# Altium PCB PCB.PcbDoc
Units mm, origin at the board's own origin, x right, y up, seen from the top; angles counter-clockwise.
Board outline 121 x 67.5 mm, 2 copper layers (Top Layer, Bottom Layer), stack 1.57 mm thick; 47 components, 32 nets, 186 pads, 30 vias.
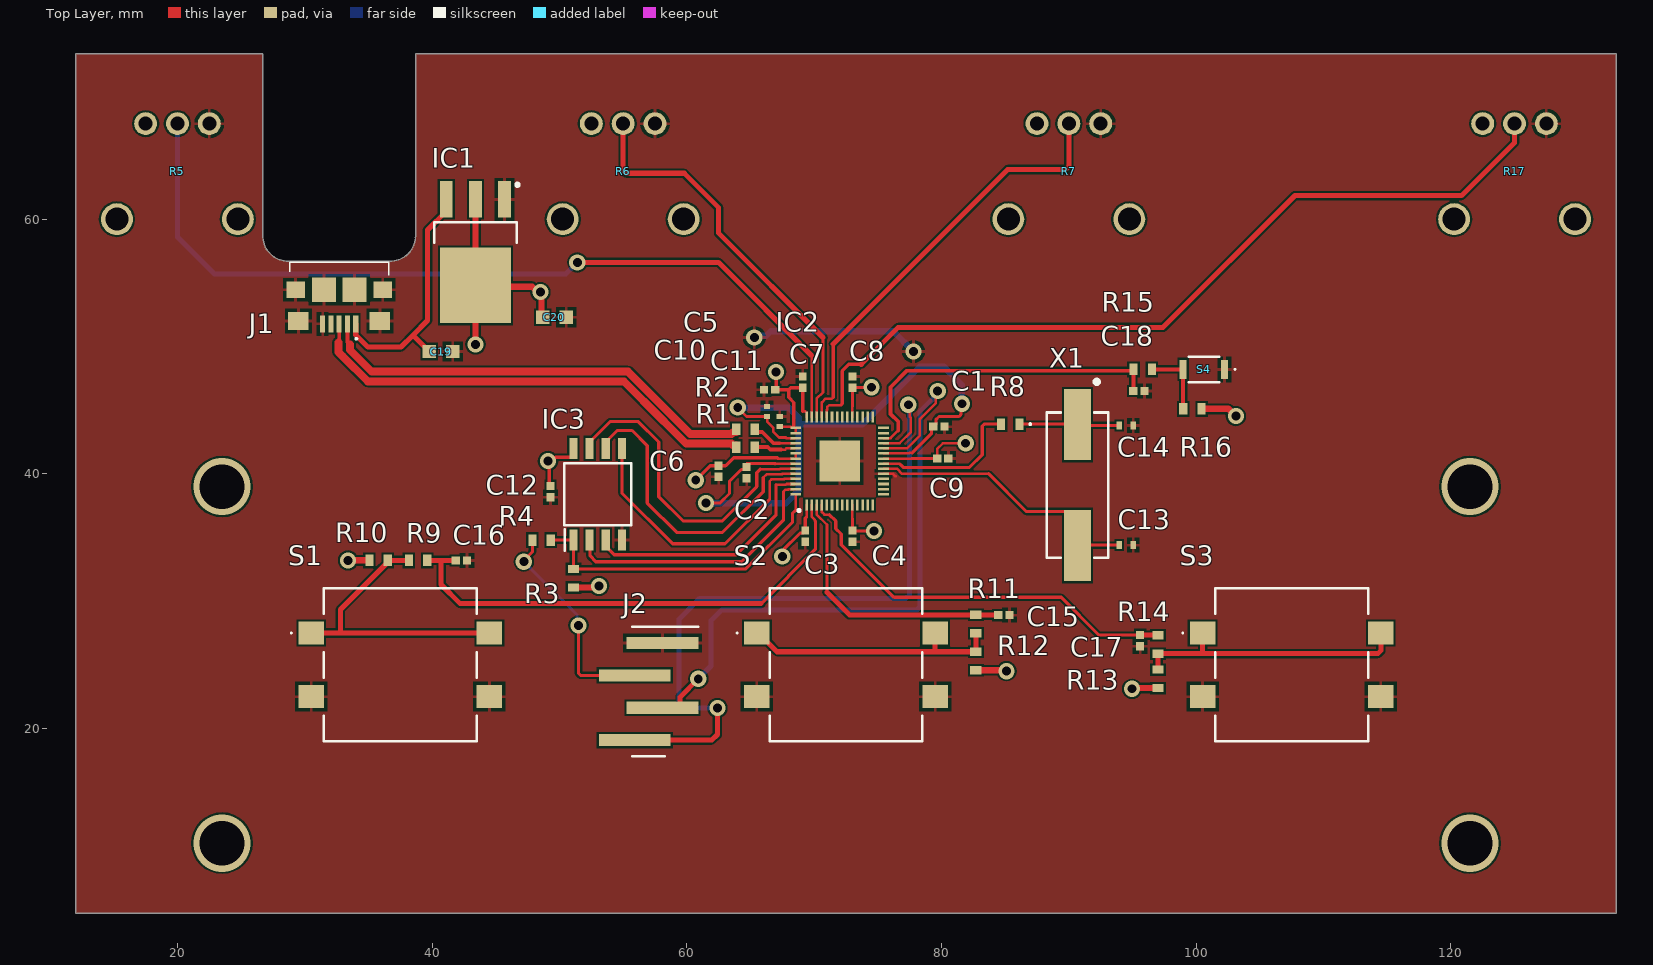
[diagram p0: Top Layer view]
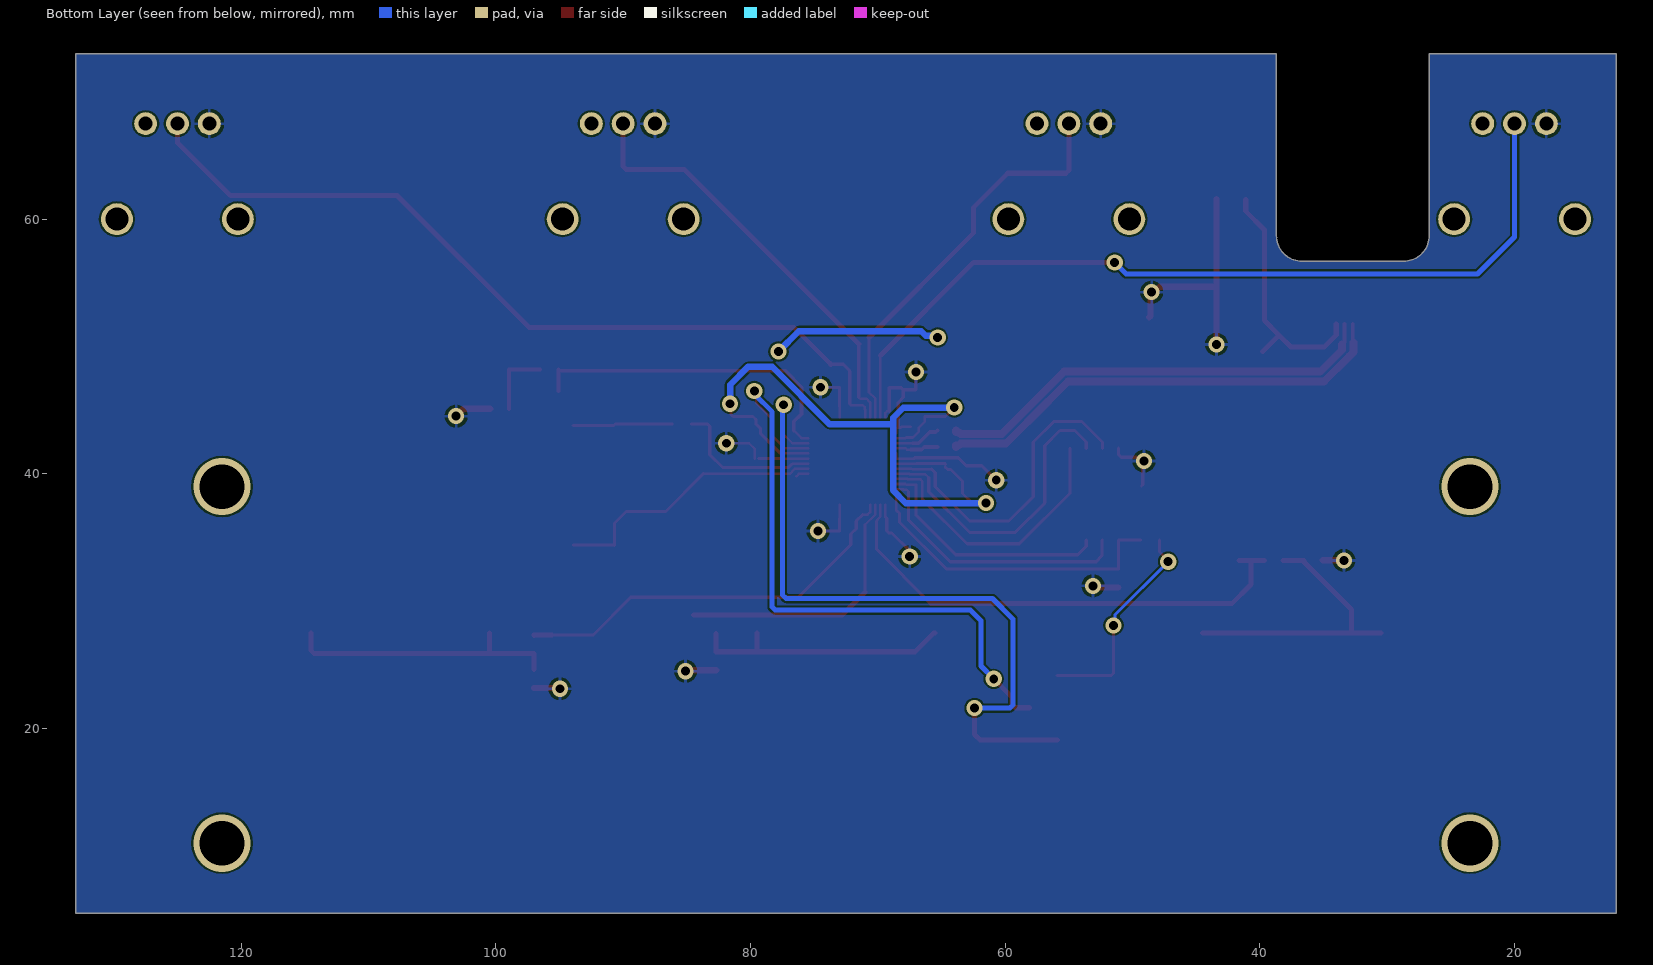
[diagram p1: Bottom Layer view, seen from below]
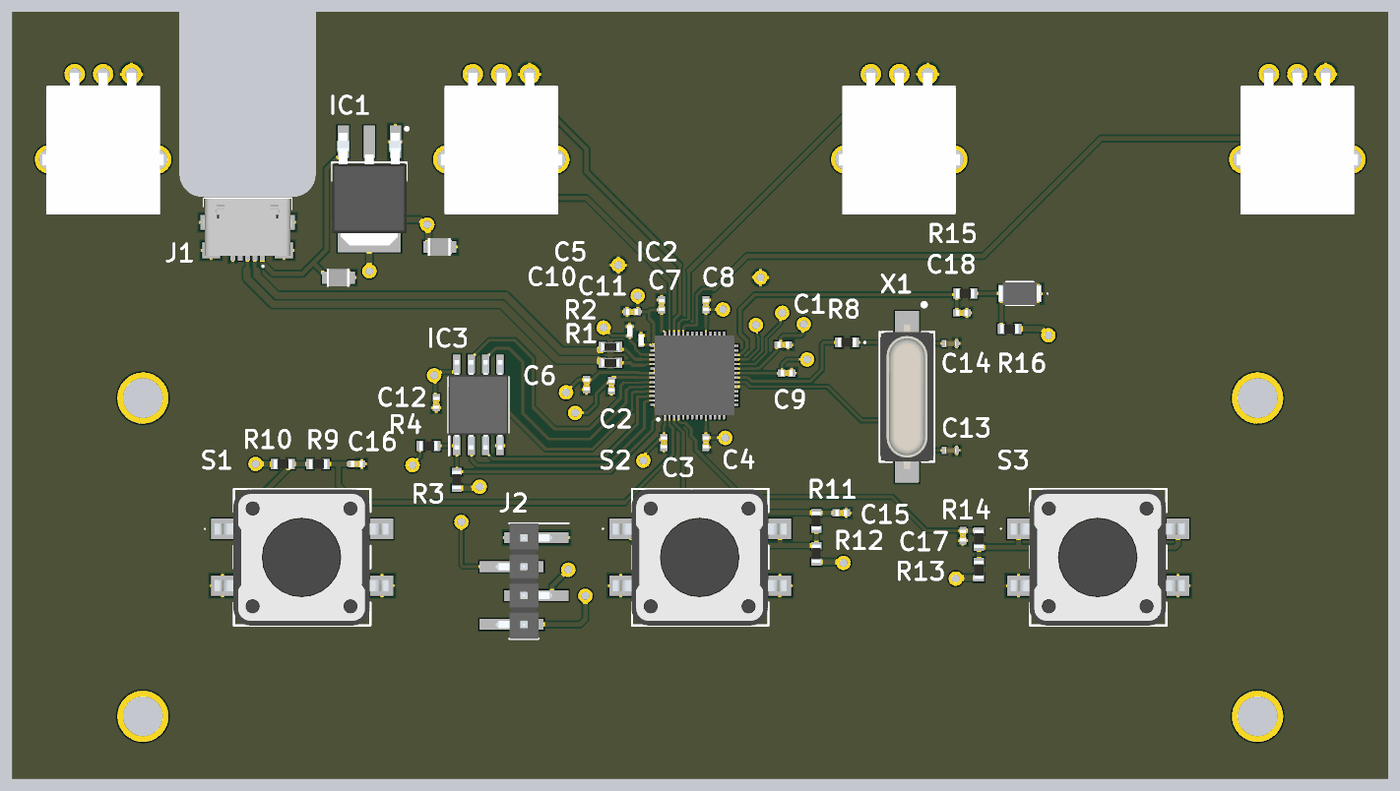
[diagram p2: 3D render of the assembled board from above, using the file's embedded part models]

## Layer stack, top to bottom
Top Solder: solder mask 0.0102, Solder Resist, Dk 3.5
Top Layer: signal copper 0.0356
Dielectric 1: core 1.4986, Core-043, Dk 4.3
Bottom Layer: signal copper 0.0356
Bottom Solder: solder mask 0.0102, Solder Resist, Dk 3.5

## Board outline
12,5.5 12,73 26.7,73 26.7,58.7 ccw(c28.7,58.7) 28.7,56.7 36.7,56.7 ccw(c36.7,58.7) 38.7,58.7 38.7,73 133,73 133,5.5

## Design rules (kind name [scope] priority, off if disabled: settings)
Clearance [All] p1: gap=0.15 ignorepadtopadclearanceinfootprint=TRUE
DiffPairsRouting "Diff USB" [All] p1: maxlimit=0.15 minlimit=0.15 mostfreqgap=0.15 toplayer_minwidth=0.3 toplayer_maxwidth=0.616 toplayer_prefwidth=0.616 bottomlayer_minwidth=0.616 bottomlayer_maxwidth=0.616 bottomlayer_prefwidth=0.616 impedanceprofiledriven=TRUE impedanceprofileid={1CA49ED8-FE3F-4F58-A43D-0094DE26AC73} impedanceprofilevalue=90.000000 maxuncoupledlength=12.7
DiffPairsRouting [All] p2: maxlimit=0.254 minlimit=0.254 mostfreqgap=0.254 toplayer_minwidth=0.381 toplayer_maxwidth=0.381 toplayer_prefwidth=0.381 bottomlayer_minwidth=0.381 bottomlayer_maxwidth=0.381 bottomlayer_prefwidth=0.381 maxuncoupledlength=12.7
Height [All] p1: minheight=0 maxheight=128 prefheight=12.7
MaxMinImpedance [InNetClass('Diff USB')] p1: minimum=85,00 maximum=95,00
PolygonConnect [All] p1: connectstyle=Relief reliefconductorwidth=0.254 reliefentries=4 polygonreliefangle="90 Angle" airgapwidth=0.254
RoutingVias [All] p1: holewidth=0.7 width=1.25 viastyle="Through Hole" minholewidth=0.7 minwidth=1.27 maxholewidth=3.5 maxwidth=4.85
SolderMaskExpansion [All] p1: expansion=0.102 istentingtop=FALSE
Width [All] p1: maxlimit=1 minlimit=0.2 preferedwidth=0.25 minimp=50.000000 maximp=50.000000 favimp=50.000000
28 further rules are at their usual default settings.

## Classes and differential pairs
differential pair class USB90Ohm: USB_D
net class "Diff USB": NetIC2_46 NetIC2_47 USB_D_N USB_D_P
differential pair USB_D: +USB_D_P -USB_D_N

## Components (designator, comment, footprint, x,y, rotation, side; value= is the part's Value field where it differs from the comment)
C1 "CGA2B1X7R1C104K050BC" CAPC1005X55N#1 79.8,43.7 r180 top
C2 "CGA2B1X7R1C104K050BC" CAPC1005X55N#1 64.7,40.1 r90 top
C3 "CGA2B1X7R1C104K050BC" CAPC1005X55N#1 69.3,35.1 r90 top
C4 "CGA2B1X7R1C104K050BC" CAPC1005X55N#1 73,35.1 r90 top
C5 "CGA2B1X7R1C104K050BC" CAPC1005X55N#1 66.5,46.6 r0 top
C6 "CGA2B1X7R1C104K050BC" CAPC1005X55N#1 62.5,40.2 r90 top
C7 "CGA2B1X7R1C104K050BC" CAPC1005X55N#1 69.1,47.2 r270 top
C8 "CGA2B1X7R1C104K050BC" CAPC1005X55N#1 73,47.2 r270 top
C9 "CGA2B1X7R1C104K050BC" CAPC1005X55N#1 80.1,41.2 r180 top
C10 "C1005X6S1C105K050BC" C1005_Commercial 66.3,44.9 r270 top
C11 "C1005X6S1C105K050BC" C1005_Commercial 67.3,44.1 r270 top
C12 "CGA2B1X7R1C104K050BC" CAPC1005X55N#1 49.296,38.6 r270 top
C13 "GJM1555C1H270FB01D" CAPC1005X55N#2 94.5,34.4 r180 top
C14 "GJM1555C1H270FB01D" CAPC1005X55N#2 94.5,43.8 r180 top
C15 "C0402C105K9PAC" CAPC1005X55N#1 84.9,28.9 r0 top
C16 "C0402C105K9PAC" CAPC1005X55N#1 42.3,33.2 r0 top
C17 "C0402C105K9PAC" CAPC1005X55N#1 95.6,26.9 r270 top
C18 "C0402C105K9PAC" CAPC1005X55N#1 95.5,46.5 r0 top
C19 "C2012X6S1C106K125AC" C2012_Commercial 40.7,49.6 r180 top
C20 "C2012X6S1C106K125AC" C2012_Commercial 49.6,52.3 r180 top
IC1 "NCP1117DT33T5G" TO229P990X238-4N 43.4,57.4 r270 top
IC2 "RPI_Chip_RP2040-10-10" QFN40P700X700X90-57N-D 72,41 r90 top
IC3 "W25Q128JVSIM" SOIC127P790X216-8N 53,38.4 r90 top
J1 "2174507-2" 21745072 32.7,54.1 r180 top
J2 "61000418321" HUSRSP4W64P254_1016X254X854P 57,22.9 r270 top
R1 "ERA3AHD27R4V" ERA3A_(0603) 64.6,42.1 r180 top
R2 "ERA3AHD27R4V" ERA3A_(0603) 64.6,43.5 r180 top
R3 "ERJ-3EKF1001V" ERJ3EK_(0603) 51.1,31.8 r270 top
R4 "ERJ-3EKF1001V" ERJ3EK_(0603) 48.6,34.8 r0 top
R5 "Pot 10k" P0915NFC15BR10K 20,60 r180 top
R6 "Pot 10k" P0915NFC15BR10K 55,60 r180 top
R7 "Pot 10k" P0915NFC15BR10K 90,60 r180 top
R8 "ERJ-3EKF1001V" ERJ3EK_(0603) 85.4,43.9 r180 top
R9 "10k" ERJ3EK_(0603) 38.9,33.2 r0 top
R10 "1k" ERJ3EK_(0603) 35.8,33.2 r180 top
R11 "10k" ERJ3EK_(0603) 82.7,28.2 r90 top
R12 "ERJ-3EKF1001V" ERJ3EK_(0603) 82.7,25.3 r270 top
R13 "1k" ERJ3EK_(0603) 97,23.9 r270 top
R14 "10k" ERJ3EK_(0603) 97,26.6 r90 top
R15 "10k" ERJ3EK_(0603) 95.8,48.2 r180 top
R16 "1k" ERJ3EK_(0603) 99.7,45.1 r0 top
R17 "Pot 10k" P0915NFC15BR10K 125,60 r180 top
S1 "430172043816" 430172043816 37.5,25 r0 top
S2 "430172043816" 430172043816 72.5,25 r0 top
S3 "430172043816" 430172043816 107.5,25 r0 top
S4 "TS19-32-06-BK-70-1-SMT-TR-67" TS193206BK701SMTTR67 100.6,48.2 r180 top
X1 "ABLS-12.000MHZ-B4-T" HC/49US-(AT49)_1 90.678,39.116 r270 top

## Footprints (in the part's own frame and the unit in brackets; to place one, negate y for a bottom-side part, rotate by r counter-clockwise, add the part's x,y. Pads: shape width x height; smd on the part's side, far side on the other; paste and mask are expansions set on the pad)
21745072 [mm]
  rect 0.4x1.35 smd: 1(-1.3,2.325) 2(-0.65,2.325) 3(0,2.325) 4(0.65,2.325) 5(1.3,2.325)
  rect 1.45x1.3 smd: MP1(-3.425,-0.35) MP1(3.425,-0.35)
  rect 1.6x1.4 smd: MP1(-3.2,2.1) MP1(3.2,2.1)
  rect 1.9x1.9 smd: MP1(-1.2,-0.35) MP1(1.2,-0.35)
  silkscreen extent -3.9,-2.5 3.9,3.55, body extent -3.9,-2.43 3.9,2.57, height 2.7
430172043816 [mm]
  rect 2x1.8 smd: 1(-7,2.5) 2(7,2.5) 3(-7,-2.5) 4(7,-2.5)
  silkscreen extent -8.6,-6 6,6, body extent -7.7,-6.02 7.6,5.98, height 4.28
C1005_Commercial [mm]
  rect 0.4x0.5 smd: 1(-0.4,0) 2(0.4,0)
  body extent -0.51,-0.25 0.49,0.25, height 0.5
C2012_Commercial [mm]
  rect 1.05x1.05 smd: 1(-0.925,0) 2(0.925,0)
  body extent -0.96,-0.8 1.04,0.8, height 1.25
CAPC1005X55N#1 [mm]
  rect 0.65x0.62 smd: 1(-0.44,0) 2(0.44,0)
  body extent -0.52,-0.28 0.53,0.27, height 0.55
CAPC1005X55N#2 [mm]
  rect 0.42x0.62 smd: 1(-0.55,0) 2(0.55,0)
  body extent -0.5,-0.25 0.5,0.25, height 0.55
ERA3A_(0603) [mm]
  rect 0.65x0.9 smd: 1(-0.725,0) 2(0.725,0)
  body extent -0.8,-0.4 0.8,0.4, height 0.45
ERJ3EK_(0603) [mm]
  rect 0.65x0.9 smd: 1(-0.725,0) 2(0.725,0)
  body extent -0.8,-0.4 0.8,0.4, height 0.45
HC/49US-(AT49)_1 [mm]
  rect 5.6x2.1 smd: 1(-4.75,0) 2(4.75,0)
  silkscreen extent -8.23,-2.4 5.7,2.4, body extent -6.35,-2.35 6.35,2.35, height 4.2
HUSRSP4W64P254_1016X254X854P [mm]
  rect 0.96x5.64 smd: 1(-3.81,1.09) 2(-1.27,-1.09) 3(1.27,1.09) 4(3.81,-1.09)
  silkscreen extent -5.08,-1.27 5.08,3.91, body extent -5.08,-2.5 5.08,2.5, height 9.3
P0915NFC15BR10K [mm]
  round 1.8 hole 1.1: 1(-2.5,-7.5) 2(0,-7.5) 3(2.5,-7.5)
  round 2.5 hole 1.8: 4(-4.75,0) 4(4.75,0)
  body extent -5.35,-7.6 5.35,4.85, height 30
QFN40P700X700X90-57N-D [mm]
  rect 0.85x0.2 smd: 1(-3.45,2.6) 2(-3.45,2.2) 3(-3.45,1.8) 4(-3.45,1.4) 5(-3.45,1) 6(-3.45,0.6) 7(-3.45,0.2) 8(-3.45,-0.2) 9(-3.45,-0.6) 10(-3.45,-1) 11(-3.45,-1.4) 12(-3.45,-1.8) 13(-3.45,-2.2) 14(-3.45,-2.6) 29(3.45,-2.6) 30(3.45,-2.2) 31(3.45,-1.8) 32(3.45,-1.4) 33(3.45,-1) 34(3.45,-0.6) 35(3.45,-0.2) 36(3.45,0.2) 37(3.45,0.6) 38(3.45,1) 39(3.45,1.4) 40(3.45,1.8) 41(3.45,2.2) 42(3.45,2.6)
  rect 0.2x0.85 smd: 15(-2.6,-3.45) 16(-2.2,-3.45) 17(-1.8,-3.45) 18(-1.4,-3.45) 19(-1,-3.45) 20(-0.6,-3.45) 21(-0.2,-3.45) 22(0.2,-3.45) 23(0.6,-3.45) 24(1,-3.45) 25(1.4,-3.45) 26(1.8,-3.45) 27(2.2,-3.45) 28(2.6,-3.45) 43(2.6,3.45) 44(2.2,3.45) 45(1.8,3.45) 46(1.4,3.45) 47(1,3.45) 48(0.6,3.45) 49(0.2,3.45) 50(-0.2,3.45) 51(-0.6,3.45) 52(-1,3.45) 53(-1.4,3.45) 54(-1.8,3.45) 55(-2.2,3.45) 56(-2.6,3.45)
  rect 3.2x3.2 smd: 57(0,0)
  silkscreen extent -3.97,3.1 -3.78,3.3, body extent -3.55,-3.55 3.55,3.55, height 0.9
SOIC127P790X216-8N [mm]
  rect 1.65x0.65 smd: 1(-3.6,1.905) 2(-3.6,0.635) 3(-3.6,-0.635) 4(-3.6,-1.905) 5(3.6,-1.905) 6(3.6,-0.635) 7(3.6,0.635) 8(3.6,1.905)
  silkscreen extent -4.43,-2.64 2.42,2.64, body extent -3.95,-2.64 3.95,2.64, height 2.16
TO229P990X238-4N [mm]
  rect 2.85x1 smd: 1(-4.15,2.29) 2(-4.15,0) 3(-4.15,-2.29)
  rect 5.95x5.55 smd: 2(2.6,0)
  silkscreen extent -5.42,-3.25 -0.75,3.43, body extent -4.96,-3.27 4.96,3.27, height 2.39
TS193206BK701SMTTR67 [mm]
  rect 0.55x1.5 smd: 1(-1.625,0) 2(1.625,0)
  silkscreen extent -2.5,-1 1.2,1, body extent -1.85,-1 1.85,1, height 0.75

## Part data
C1 C2 C3 C4 C5 C6 C7 C8 C9 C12: "Capacitor 100nF 16V", Manufacturer_Name=TDK, Mouser Part Number=810-CGA2B1X7R1C104K, Arrow Part Number=CGA2B1X7R1C104K050BC, Arrow Price/Stock=https://www.arrow.com/en/products/cga2b1x7r1c104k050bc/tdk?region=nac, Datasheet Link=https://product.tdk.com/system/files/dam/doc/product/capacitor/ceramic/mlcc/catalog/mlcc_automotive_general_en.pdf, Height=0.55mm, Manufacturer_Part_Number=CGA2B1X7R1C104K050BC, Mouser Price/Stock=https://www.mouser.co.uk/ProductDetail/TDK/CGA2B1X7R1C104K050BC?qs=NRhsANhppD8tgIeNjgC%2Fqg%3D%3D
C10 C11: "Capacitor 0402 1µF 16V", Manufacturer_Name=TDK, Mouser Part Number=810-C1005X6S1C105K, Arrow Part Number=C1005X6S1C105K050BC, Arrow Price/Stock=https://www.arrow.com/en/products/c1005x6s1c105k050bc/tdk?region=nac, Datasheet Link=https://product.tdk.com/system/files/dam/doc/product/capacitor/ceramic/mlcc/catalog/mlcc_commercial_general_en.pdf, Height=0.55mm, Manufacturer_Part_Number=C1005X6S1C105K050BC, Mouser Price/Stock=https://www.mouser.co.uk/ProductDetail/TDK/C1005X6S1C105K050BC?qs=dfay7wIA1uGWVKHpqb9RWw%3D%3D
C13 C14: "Capacitor 27pF 50V", Manufacturer_Name="Murata Electronics", Mouser Part Number=81-GJM1555C1H270FB1D, Arrow Part Number=GJM1555C1H270FB01D, Arrow Price/Stock=https://www.arrow.com/en/products/gjm1555c1h270fb01d/murata-manufacturing?region=nac, Datasheet Link=https://psearch.en.murata.com/capacitor/product/GJM1555C1H270FB01%23.html, Height=0.55mm, Manufacturer_Part_Number=GJM1555C1H270FB01D, Mouser Price/Stock=https://www.mouser.co.uk/ProductDetail/Murata-Electronics/GJM1555C1H270FB01D?qs=ui%252B2d9lVEI5sysymhzLg%252Bw%3D%3D
C15 C16 C17 C18: "Capacitor 1µF 6V3 0402", Manufacturer_Name=KEMET, Mouser Part Number=80-C0402C105K9PAC, Arrow Part Number=C0402C105K9PAC, Arrow Price/Stock=https://www.arrow.com/en/products/c0402c105k9pac/kemet-corporation?region=nac, Datasheet Link=https://content.kemet.com/datasheets/KEM_C1002_X7R_SMD.pdf, Height=0.55mm, Manufacturer_Part_Number=C0402C105K9PAC, Mouser Price/Stock=https://www.mouser.co.uk/ProductDetail/KEMET/C0402C105K9PAC?qs=AHS6Mz2dKxPyNrxaU50ZkQ%3D%3D
C19 C20: "Capacitor 10µF 16V 0805", Manufacturer_Name=TDK, Mouser Part Number=810-C2012X6S1C106K1C, Arrow Part Number=C2012X6S1C106K125AC, Arrow Price/Stock=https://www.arrow.com/en/products/c2012x6s1c106k125ac/tdk, Datasheet Link=https://product.tdk.com/system/files/dam/doc/product/capacitor/ceramic/mlcc/catalog/mlcc_commercial_general_en.pdf, Height=0.75mm, Manufacturer_Part_Number=C2012X6S1C106K125AC, Mouser Price/Stock=https://www.mouser.co.uk/ProductDetail/TDK/C2012X6S1C106K125AC?qs=QN15moyvde8Kow3LarSCcA%3D%3D
IC1: "LDO 3V3 out", Manufacturer_Name=onsemi, Mouser Part Number=863-NCP1117DT33T5G, Arrow Part Number=NCP1117DT33T5G, Arrow Price/Stock=https://www.arrow.com/en/products/ncp1117dt33t5g/on-semiconductor?region=nac, Datasheet Link=http://www.onsemi.com/pub/Collateral/NCP1117-D.PDF, Height=2.38mm, Manufacturer_Part_Number=NCP1117DT33T5G, Mouser Price/Stock=https://www.mouser.co.uk/ProductDetail/onsemi/NCP1117DT33T5G?qs=Gev%252BmEvV0ibY9yFNc3ZYyw%3D%3D
IC2: "RP2040 MCU", Manufacturer_Name=RASPBERRY-PI, Manufacturer_Part_Number="RPI Chip RP2040-10-10", Mouser Part Number=358-RP2040CHIP-10-10, Datasheet Link=https://datasheets.raspberrypi.com/rp2040/rp2040-datasheet.pdf, Height=0.9mm, Mouser Price/Stock=https://www.mouser.co.uk/ProductDetail/Raspberry-Pi/RPI-Chip-RP2040-10-10?qs=QNEnbhJQKva2vG4DZ5VuhA%3D%3D
IC3: "128 SPI Nor flash", Manufacturer_Name=Winbond, Mouser Part Number=454-W25Q128JVSIM, Arrow Part Number=W25Q128JVSIM, Arrow Price/Stock=https://www.arrow.com/en/products/w25q128jvsim/winbond-electronics?region=nac, Datasheet Link=https://www.winbond.com/hq/search-resource-file.jsp?partNo=W25Q128JVSIM&type=datasheet, Height=2.16mm, Manufacturer_Part_Number=W25Q128JVSIM, Mouser Price/Stock=https://www.mouser.co.uk/ProductDetail/Winbond/W25Q128JVSIM?qs=qSfuJ%252Bfl%2Fd6d7A5WLggp6w%3D%3D
J1: "Micro USB Connector", Manufacturer_Name="TE Connectivity", Mouser Part Number=571-2174507-2, Arrow Part Number=2174507-2, Arrow Price/Stock=https://www.arrow.com/en/products/2174507-2/te-connectivity?region=nac, Datasheet Link=https://componentsearchengine.com/Datasheets/1/2174507-2.pdf, Height=2.86mm, Manufacturer_Part_Number=2174507-2, Mouser Price/Stock=https://www.mouser.co.uk/ProductDetail/TE-Connectivity/2174507-2?qs=kAqyOuzYGe%252BUWCFD1qNBLQ%3D%3D
J2: "Connector", Manufacturer_Name="Wurth Elektronik", Datasheet Link=https://www.we-online.com/catalog/datasheet/61000418321.pdf, Manufacturer_Part_Number=61000418321
R1 R2: "Resistor 0603 27.4Ohm", Manufacturer_Name=Panasonic, Datasheet Link=http://industrial.panasonic.com/cdbs/www-data/pdf/RDM0000/AOA0000C307.pdf, Height=0.5mm, Manufacturer_Part_Number=ERA3AHD27R4V
R3 R4 R8 R12: "Resistor 1k 0603", Manufacturer_Name=Panasonic, Mouser Part Number=667-ERJ-3EKF1001V, Arrow Part Number=ERJ-3EKF1001V, Arrow Price/Stock=https://www.arrow.com/en/products/erj-3ekf1001v/panasonic?region=nac, Datasheet Link=https://industrial.panasonic.com/cdbs/www-data/pdf/RDA0000/AOA0000C304.pdf, Height=0.55mm, Manufacturer_Part_Number=ERJ-3EKF1001V, Mouser Price/Stock=https://www.mouser.co.uk/ProductDetail/Panasonic/ERJ-3EKF1001V?qs=H7k1u0Mp9JTM8yQxOuvoDg%3D%3D
R5 R6 R7 R17: library part P0915N-FC15BR10K, "POT 10k", Manufacturer_Name="TT Electronics", Mouser Part Number=858-P0915N-FC15BR10K, Arrow Part Number=P0915N-FC15BR10K, Arrow Price/Stock=https://www.arrow.com/en/products/p0915n-fc15br10k/bi-technologies?region=nac, Datasheet Link=https://datasheet.datasheetarchive.com/originals/distributors/Datasheets_SAMA/b6f9aacdbf7d1767bdcee7cb40d23820.pdf, Height=11mm, Manufacturer_Part_Number=P0915N-FC15BR10K, Mouser Price/Stock=https://www.mouser.com/Search/Refine.aspx?Keyword=858-P0915N-FC15BR10K
R9 R11 R14 R15: library part ERJ-3EKF1001V, "Resistor 10k 0603", Manufacturer_Name=Panasonic, Mouser Part Number=667-ERJ-3EKF1001V, Arrow Part Number=ERJ-3EKF1001V, Arrow Price/Stock=https://www.arrow.com/en/products/erj-3ekf1001v/panasonic?region=nac, Datasheet Link=https://industrial.panasonic.com/cdbs/www-data/pdf/RDA0000/AOA0000C304.pdf, Height=0.55mm, Manufacturer_Part_Number=ERJ-3EKF1001V, Mouser Price/Stock=https://www.mouser.co.uk/ProductDetail/Panasonic/ERJ-3EKF1001V?qs=H7k1u0Mp9JTM8yQxOuvoDg%3D%3D
R10 R13 R16: library part ERJ-3EKF1001V, "Resistor 1k 0603", Manufacturer_Name=Panasonic, Mouser Part Number=667-ERJ-3EKF1001V, Arrow Part Number=ERJ-3EKF1001V, Arrow Price/Stock=https://www.arrow.com/en/products/erj-3ekf1001v/panasonic?region=nac, Datasheet Link=https://industrial.panasonic.com/cdbs/www-data/pdf/RDA0000/AOA0000C304.pdf, Height=0.55mm, Manufacturer_Part_Number=ERJ-3EKF1001V, Mouser Price/Stock=https://www.mouser.co.uk/ProductDetail/Panasonic/ERJ-3EKF1001V?qs=H7k1u0Mp9JTM8yQxOuvoDg%3D%3D
S1 S2 S3: "Switch", Manufacturer_Name="Wurth Elektronik", Mouser Part Number=710-430172043816, Datasheet Link=https://www.we-online.com/catalog/datasheet/430172043816.pdf, Height=4.3mm, Manufacturer_Part_Number=430172043816, Mouser Price/Stock=https://www.mouser.co.uk/ProductDetail/Wurth-Elektronik/430172043816?qs=sPbYRqrBIVkS9EzfxGfqQA%3D%3D
S4: "Switch", Manufacturer_Name="CUI Inc.", Mouser Part Number=179-TS193206BK701SM, Datasheet Link=https://www.cuidevices.com/product/resource/ts19.pdf, Height=0.65mm, Manufacturer_Part_Number=TS19-32-06-BK-70-1-SMT-TR-67, Mouser Price/Stock=https://www.mouser.co.uk/ProductDetail/CUI-Devices/TS19-32-06-BK-70-1-SMT-TR-67?qs=tlsG%2FOw5FFj0aJkgA5InKg%3D%3D
X1: "Crystal oscillator", Manufacturer_Name=ABRACON, Mouser Part Number=815-ABLS-12.0M-T, Arrow Part Number=ABLS-12.000MHZ-B4-T, Arrow Price/Stock=https://www.arrow.com/en/products/abls-12.000mhz-b4-t/abracon?region=nac, Datasheet Link=https://componentsearchengine.com/Datasheets/2/ABLS-12.000MHZ-B4-T.pdf, Manufacturer_Part_Number=ABLS-12.000MHZ-B4-T, Mouser Price/Stock=https://www.mouser.co.uk/ProductDetail/ABRACON/ABLS-12.000MHZ-B4-T?qs=yTU0IcKoRlGSQ8ooxPPVnQ%3D%3D

## Via types
v1: diameter 1.27, hole 0.7, Top Layer to Bottom Layer, 26 vias
v2: diameter 4.5, hole 3.5, Top Layer to Bottom Layer, 4 vias

## Nets (pads, with @x,y where several pads share a name; then routed paths per layer and width w, separated by ;. In a path a pad name is that pad's centre, name@x,y a point inside that pad or via, vN(x,y) a via of type N, cw(c..) or ccw(c..) an arc to the next point about the centre after c; other vN are vias at no path point)
1V1: C1.2 C2.2 C10.2 IC2.23 IC2.45 IC2.50 | length 58.8
  Top Layer w0.2: v1(64,45.2) 64.7,44.5 C10.2 66.3,44.1 66.8,43.6 66.8,43.3 67.25,42.85 67.763,42.85 67.813,42.8 IC2.45 ; 66.927,40.786 66.941,40.8 67.312,40.8 IC2.50 ; IC2.23 77.449,41.6 77.466,41.6 77.516,41.65 77.7,41.65
  Top Layer w0.25: v1(61.5,37.7) 62.6,37.7 63.355,38.455 63.355,39.41 64.285,40.34 64.515,40.34 64.7,40.525 C2.2 ; 77.7,41.65 79.222,43.172 79.222,43.562 C1.2 79.375,43.7 79.56,43.885 79.56,44.26 79.8,44.5 81.379,44.5 81.525,44.646 81.525,45.425 v1(81.6,45.5)
  Top Layer w0.254: C2.2@64.7,40.759 64.754,40.813 66.9,40.813 66.927,40.786
  Bottom Layer w0.5: v1(61.5,37.7) 67.807,37.7 68.8,38.693 68.8,43.9 ; v1(64,45.2) 68.007,45.2 68.8,44.407 68.8,43.9 ; v1(81.6,45.5) 81.6,47 80.2,48.4 78.3,48.4 73.8,43.9 68.8,43.9
3V3: C3.2 C4.2 C5.2 C6.2 C7.2 C8.2 C9.2 C11.2 C12.1 C20.2 IC1.2 IC2.1 IC2.10 IC2.22 IC2.33 IC2.42 IC2.43 IC2.44 IC2.48 IC2.49 IC3.8 R3.2 R5.3 R6.3 R7.3 R10.2 R12.2 R13.2 R16.2 R17.3 | length 74.1
  Top Layer w0.2: 67.135,41.227 67.135,41.213 67.175,41.2 IC2.49 IC2.48 ; C11.2@67.4,43.7 68.125,43.7 68.225,43.6 IC2.43 IC2.44 ; 69.1,44.9 69.283,44.9 69.4,44.783 IC2.42 ; 69.375,36.6 69.4,36.6 IC2.1 ; 73,36.5 IC2.10 ; IC2.33 73,45.3 ; IC2.22 77.65,41.2 ; C9.2@79.675,41.2 79.675,41.975 80.1,42.4 v1(81.9,42.4)
  Top Layer w0.25: C12.1 49.198,39.138 49.198,40.902 v1(49.1,41) 49.376,41 49.676,41.3 50.895,41.3 51.095,41.5 IC3.8 ; v1(67,48) 67.02,47.98 67.02,46.6 68,46.6 ; v1(67.5,33.5) 67.5,33.955 68.885,35.34 69.115,35.34 69.3,35.525 C3.2 69.3,36.525 69.375,36.6 ; IC2.43@68.4,43.625 68.4,45.6 68,46 68,46.614 68.146,46.76 C7.2 69.1,44.9 ; 73,36.5 C4.2 73.02,35.52 74.68,35.52 v1(74.7,35.5) ; 73,45.3 C8.2 73.02,46.78 74.48,46.78 v1(74.5,46.8) ; 77.65,41.2 C9.2@79.36,41.2
  Top Layer w0.254: v1(60.7,39.5) 61.826,40.626 63.042,40.626 63.683,41.267 67.095,41.267 67.135,41.227
  Top Layer w0.5: v1(33.4,33.2) R10.2 ; IC1.2@43.4,61.55 IC1.2@43.4,54.8 ; v1(43.409,50.162) 43.4,50.172 IC1.2@43.4,54.8 ; C20.2 48.587,52.387 48.587,54.178 v1(48.5,54.265) 48.292,54.265 47.857,54.7 43.5,54.7 IC1.2@43.4,54.8 ; R3.2 52.975,31.075 v1(53.1,31.2) ; R12.2 85.025,24.575 v1(85.1,24.5) ; v1(94.968,23.118) 95.024,23.175 R13.2 ; R16.2 102.541,45.1 v1(103.113,44.527)
5V: C19.2 IC1.3 J1.1 | length 19.7
  Top Layer w0.4: J1.1 34,50.9 34.951,49.949 37.549,49.949 38.487,50.888 ; C19.2 38.487,50.888 ; IC1.3 41.11,60.625 39.638,59.153 39.638,52.038 38.487,50.888
B1: C16.1 IC2.2 R9.2 | length 39.3
  Top Layer w0.2: IC2.2 69.8,36.801 69.8,36.634 70.063,36.371 70.063,36.333
  Top Layer w0.254: 40.635,33.2 40.7,33.135 ; 65.833,29.8 70.1,34.067 70.1,36.296 70.063,36.333
  Top Layer w0.4: R9.2 40.635,33.2 C16.1@41.645,33.2 ; 40.7,33.135 40.7,31.3 42.2,29.8 65.833,29.8
B2: C15.1 IC2.3 R11.2 | length 21.4
  Top Layer w0.2: IC2.3 70.2,36.8 71,36
  Top Layer w0.254: 71,30.7 71,36
  Top Layer w0.4: 71,30.7 72.775,28.925 R11.2 82.712,28.912 84.448,28.912 C15.1
B3: C17.1 IC2.4 R14.2 | length 31.8
  Top Layer w0.2: IC2.4 70.6,37.001 70.801,36.8 71.2,36.8
  Top Layer w0.254: 71.2,36.8 71.7,36.3 71.7,35.7 72.127,35.273 72.127,34.435 76.263,30.3 89.4,30.3 92.367,27.333 C17.1@95.607,27.333
  Top Layer w0.4: C17.1@95.607,27.333 96.992,27.333 R14.2
GND: C1.1 C2.1 C3.1 C4.1 C5.1 C6.1 C7.1 C8.1 C9.1 C10.1 C11.1 C12.2 C13.1 C14.1 C15.2 C16.2 C17.2 C18.2 C19.1 C20.1 IC1.1 IC2.19 IC2.57 IC3.4 J1.5 J1.MP1 J2.1 R5.1 R6.1 R7.1 R17.1 S1.3 S1.4 S2.3 S2.4 S3.3 S3.4 S4.1 | length 14.4
  Top Layer w0.2: IC2.19 76.2,40 76.4,39.8
  Bottom Layer w0.5: v1(65.3,50.7) 65.447,50.847 66.247,50.847 66.6,51.2 76.2,51.2 v1(77.8,49.6)
NetC14_2: C14.2 R8.1 X1.1 | length 7.9
  Top Layer w0.25: R8.1 90.644,43.9 X1.1 90.744,43.8 C14.2
NetIC2_46: IC2.46 R2.1 | length 3.6
  Top Layer w0.2: 67.3,42.4 IC2.46
  Top Layer w0.3: R2.1@65.325,43.4 65.45,43.275 65.925,43.275 66.8,42.4 67.3,42.4
NetIC2_47: IC2.47 R1.1 | length 3.3
  Top Layer w0.2: 67.4,41.9 67.725,41.9 67.825,42 IC2.47
  Top Layer w0.3: R1.1 66.35,42.1 66.55,41.9 67.4,41.9
NetJ2_2: J2.2 R4.1 | length 17
  Top Layer w0.254: v1(47.2,33.1) 47.2,33.187 47.875,33.862 R4.1 ; v1(51.5,28.1) 51.5,24.319 51.649,24.17 J2.2
  Bottom Layer w0.254: v1(47.2,33.1) 51.386,28.914 51.386,28.214 v1(51.5,28.1)
NetR9_1: R9.1 R10.1 S1.1 S1.2 | length 22.9
  Top Layer w0.4: S1.1 32.8,27.5 ; R9.1 R10.1 36.525,33.075 32.8,29.35 32.8,27.5 ; S1.2 32.8,27.5
NetR11_1: R11.1 R12.1 S2.1 S2.2 | length 20.7
  Top Layer w0.4: S2.1 65.6,27.5 67.075,26.025 79.5,26.025 ; S2.2 79.5,26.025 ; R11.1 R12.1 79.5,26.025
NetR13_1: R13.1 R14.1 S3.1 S3.2 | length 21.9
  Top Layer w0.4: R13.1 R14.1 100.5,25.875 ; S3.1 100.5,25.875 ; S3.2 114.5,26.109 114.266,25.875 100.5,25.875
NetR15_1: R15.1 R16.1 S4.2 | length 5.6
  Top Layer w0.3: R15.1 S4.2 R16.1
Pot1: IC2.38 R17.2 | length 66.4
  Top Layer w0.2: IC2.38 71,45.009 71.025,45.034 71.025,45.234 71.191,45.4 72.083,45.4
  Top Layer w0.254: 72.083,45.4 72.2,45.517 72.2,48.083 72.717,48.6 73.7,48.6
  Top Layer w0.4: 73.7,48.6 76.6,51.5 97.4,51.5 107.75,61.85 120.85,61.85 125,66 R17.2
Pot2: IC2.39 R7.2 | length 34
  Top Layer w0.2: IC2.39 70.6,45.6 70.9,45.9 71.383,45.9 71.5,46.017
  Top Layer w0.254: 71.5,46.017 71.5,50.2
  Top Layer w0.4: 71.5,50.2 85.2,63.9 89.766,63.9 90,64.134 R7.2
Pot3: IC2.40 R6.2 | length 32.4
  Top Layer w0.2: IC2.40 70.2,45.9 70.7,46.4
  Top Layer w0.254: 70.7,46.4 70.7,50.7
  Top Layer w0.4: R6.2 55,63.834 55.234,63.6 59.8,63.6 62.5,60.9 62.5,58.9 70.7,50.7
Pot4: IC2.41 R5.2 | length 68.1
  Top Layer w0.2: IC2.41 69.8,49.3
  Top Layer w0.4: v1(51.4,56.6) 62.5,56.6 69.8,49.3
  Bottom Layer w0.4: R5.2 20,58.6 22.9,55.7 50.5,55.7 v1(51.4,56.6)
QSPI_CLK: IC2.52 IC3.6 | length 24.3
  Top Layer w0.2: 66,39.7 66.259,39.959 67.463,39.959 67.504,40 67.643,40 IC2.52
  Top Layer w0.254: IC3.6 53.635,42.5 54.535,43.4 55.7,43.4 56.9,42.2 56.9,37.7 59.2,35.4 62.8,35.4 66,38.6 66,39.7
QSPI_SD0: IC2.53 IC3.5 | length 21.7
  Top Layer w0.2: 66.5,38 66.5,39.415 66.644,39.559 67.628,39.559 67.669,39.6 67.809,39.6 IC2.53
  Top Layer w0.254: IC3.5 54.905,38.495 58.9,34.5 63,34.5 66.5,38
QSPI_SD1: IC2.55 IC3.2 | length 21.3
  Top Layer w0.2: 67.6,38.615 67.717,38.732 67.933,38.732 68.001,38.8 IC2.55
  Top Layer w0.254: IC3.2 52.4,34.765 52.4,33.549 52.849,33.1 64.3,33.1 67.6,36.4 67.6,38.615
QSPI_SD2: IC2.54 IC3.3 | length 19.4
  Top Layer w0.2: 67,39.132 67.767,39.132 67.835,39.2 67.974,39.2 IC2.54
  Top Layer w0.254: IC3.3 53.635,34.3 54.287,33.648 63.896,33.648 67,36.752 67,39.132
QSPI_SD3: IC2.51 IC3.7 | length 25.4
  Top Layer w0.2: 65.759,40.359 67.297,40.359 67.338,40.4 67.477,40.4 IC2.51
  Top Layer w0.254: IC3.7 52.365,42.5 53.965,44.1 56.2,44.1 57.8,42.5 57.8,38.2 59.7,36.3 62.804,36.3 65.5,38.996 65.5,40.1 65.759,40.359
QSPI_SS: IC2.56 IC3.1 R3.1 R4.2 | length 25.1
  Top Layer w0.2: 68.55,37.15 IC2.56
  Top Layer w0.254: R4.2 IC3.1 R3.1@51.095,32.53 ; R3.1 R3.1@51.095,32.53 ; 68.55,37.15 68.3,36.9 68.3,36.2 64.63,32.53 R3.1@51.095,32.53
RUN: C18.1 IC2.26 R15.2 | length 26.4
  Top Layer w0.2: IC2.26 75.999,42.8 76.6,43.401
  Top Layer w0.3: 76.6,43.401 76.6,44.1 76,44.7 76,46.8 77.3,48.1 94.975,48.1 R15.2@95.067,48.192 ; C18.1 95.067,46.507 R15.2@95.067,48.192 ; R15.2 R15.2@95.067,48.192
SWCLK: IC2.24 J2.3 | length 50.8
  Top Layer w0.2: IC2.24 77.3,42 78.3,43 78.3,44.3 79.565,45.565 79.565,46.365 v1(79.7,46.5)
  Top Layer w0.4: J2.3 59.196,21.63 59.476,21.91 59.476,22.476 v1(60.9,23.9)
  Bottom Layer w0.4: v1(60.9,23.9) 61.9,24.9 61.9,28.466 62.734,29.3 78.066,29.3 78.3,29.534 78.3,44.865 79.7,46.265 v1(79.7,46.5)
SWDIO: IC2.25 J2.4 | length 57.2
  Top Layer w0.2: IC2.25 76.7,42.4 77.6,43.3 77.6,44.388 77.5,44.488 77.5,45.317 v1(77.394,45.423)
  Top Layer w0.4: J2.4 61.956,19.09 62.4,19.534 v1(62.4,21.6)
  Bottom Layer w0.4: v1(62.4,21.6) 59.634,21.6 59.4,21.834 59.4,28.6 61,30.2 77.2,30.2 77.5,30.5 77.5,45.317 v1(77.394,45.423)
USB_D_N: J1.2 R2.2 | length 35.4
  Top Layer w0.2: 33.4,50.3 33.541,50.159
  Top Layer w0.3: J1.2 33.35,50.35 33.4,50.3
  Top Layer w0.616: 33.541,50.159 33.541,49.741 35.259,48.024 55.376,48.024 60.267,43.133 63.497,43.133 63.622,43.258 63.858,43.258 63.875,43.275 R2.2@63.875,43.4
USB_D_P: J1.3 R1.2 | length 36.6
  Top Layer w0.3: 32.634,50.3 32.7,50.366 J1.3
  Top Layer w0.616: 32.634,50.3 32.634,49.566 33,49.2 34.941,47.259 55.059,47.259 58.054,44.264 58.459,43.859 59.95,42.367 63.497,42.367 63.622,42.242 63.858,42.242 63.875,42.225 R1.2
XIN: C13.2 IC2.20 X1.2 | length 22
  Top Layer w0.2: IC2.20 76.5,40.4 76.9,40 83.7,40
  Top Layer w0.25: 83.7,40 86.659,37.041 89.753,37.041 90.678,36.116 X1.2 90.712,34.4 C13.2
XOUT: IC2.21 R8.2 | length 12.1
  Top Layer w0.2: IC2.21 76.701,40.8 76.801,40.701
  Top Layer w0.25: 76.801,40.701 77.001,40.5 82.2,40.5 83.2,41.5 83.2,43.754 83.346,43.9 R8.2
pads on no net: IC2.5 IC2.6 IC2.7 IC2.8 IC2.9 IC2.11 IC2.12 IC2.13 IC2.14 IC2.15 IC2.16 IC2.17 IC2.18 IC2.27 IC2.28 IC2.29 IC2.30 IC2.31 IC2.32 IC2.34 IC2.35 IC2.36 IC2.37 J1.4 R5.4 R6.4 R7.4 R17.4
copper on no net:
  other v2: 23.5,11 121.5,11 23.5,39 121.5,39

## Polygon pours and split planes (outlines as drawn)
3V3 on Bottom Layer "3V3_L02_P003" (solid, pour order 3): 12,5.5 12,73 26.7,73 26.7,58.7 ccw(c28.7,58.7) 28.7,56.7 36.7,56.7 ccw(c36.7,58.7) 38.7,58.7 38.7,73 133,73 133,5.5
GND on Top Layer "GND_L01_P002" (solid, remove dead copper, pour order 2): 12,5.5 12,73 26.7,73 26.7,58.7 ccw(c28.7,58.7) 28.7,56.7 36.7,56.7 ccw(c36.7,58.7) 38.7,58.7 38.7,73 133,73 133,5.5

## Silkscreen, mask and mechanical layers (free items; w line width, h text height)
Mechanical 1:
  circle w0.013: c23.5,11 r2
  circle w0.013: c121.5,11 r2
  circle w0.013: c121.5,39 r2
  circle w0.013: c23.5,39 r2
  lines w0.013: 12,5.5 133,5.5 133,73 38.7,73 38.7,58.7 cw(c36.7,58.7) 36.7,56.7 28.7,56.7 cw(c28.7,58.7) 26.7,58.7 26.7,73 12,73 12,5.5